# EAGLE board helmetpcb_bak (EAGLE 6.1)

Size 160 x 100 mm. Coordinates in mm from the lower left corner, seen from the top.
Outline: 0,0 160,0 160,100 0,100 0,0
Copper layers (1*16): Top 0.035mm / dielectric 1.5mm / Bottom 0.035mm
Design rules: minimum track width 10mil, minimum drill 24mil, track to track 8mil, track to pad 8mil, pad to pad 8mil, via to via 8mil, smd to smd 8mil, copper to edge 40mil, drill to drill 8mil, minimum pad ring 10mil, minimum via ring 8mil, stop-mask expansion 4mil, vias tented up to drill 0mil, thermal gap 10mil
Net classes: 1 vcc: width 0.254 mm
tKeepout: area 8.4,69 to 40.4,95

## Footprints (pad centres in the part's own frame; a part is rotated, then mirrored left to right if it is on the bottom)
C0402 = smd 0.7 x 0.9: 1 -0.65,0; 2 0.65,0
EIA3216 = smd 1.4 x 1.6: A 1.4,0; C -1.4,0
LED-0603 = smd 0.8 x 0.8: A 0,-0.75; C 0,0.75
1X02 = drill 1.016 long: 1 -1.27,0; 2 1.27,0
1X02' = drill 1.016: 1 0,0; 2 2.54,0
RESONATOR-SMD = smd 0.7 x 1.7: 1 -1.2,0; 2 0,0; 3 1.2,0
SOT23-BEC = smd 1 x 1.4: B -0.95,-1.1; C 0,1.1; E 0.95,-1.1
B3F-31XX = drill 1.016 octagon: 1 -2.261,-1.245; 2 2.261,-1.245 | drill 1.499 pad 2.159: 3 -3.505,1.245; 4 3.505,1.245
MA03-2 = drill 1.016: 1 -2.54,-1.27 | drill 1.016 octagon: 2 -2.54,1.27; 3 0,-1.27; 4 0,1.27; 5 2.54,-1.27; 6 2.54,1.27
SOT23-5 = smd 0.55 x 1.2: 1 -0.95,-1.3; 2 0,-1.3; 3 0.95,-1.3; 4 0.95,1.3; 5 -0.95,1.3
DSO-8-2 = smd 0.6 x 1.8: P$1 -1.905,-1.27; P$2 -0.635,-1.27; P$3 0.635,-1.27; P$4 1.905,-1.27; P$5 1.905,5.08; P$6 0.635,5.08; P$7 -0.635,5.08; P$8 -1.905,5.08
SO08 = smd 0.66 x 2.032: 1 -1.905,-3.073; 2 -0.635,-3.073; 3 0.635,-3.073; 4 1.905,-3.073; 5 1.905,3.073; 6 0.635,3.073; 7 -0.635,3.073; 8 -1.905,3.073
QFN20 = smd 1 x 1: 0 0,0 | smd 0.65 x 0.3: 1 -1.9,1; 2 -1.9,0.5; 3 -1.9,0; 4 -1.9,-0.5; 5 -1.9,-1; 11 1.9,-1; 12 1.9,-0.5; 13 1.9,0; 14 1.9,0.5; 15 1.9,1 | smd 0.3 x 0.65: 6 -1,-1.9; 7 -0.5,-1.9; 8 0,-1.9; 9 0.5,-1.9; 10 1,-1.9; 16 1,1.9; 17 0.5,1.9; 18 0,1.9; 19 -0.5,1.9; 20 -1,1.9
FIDUCIAL-1X2 = smd 1 x 1: 1 0,0
FE07 = drill 0.813 long: 1 -7.62,0; 3 -2.54,0; 4 0,0; 5 2.54,0; 6 5.08,0; 7 7.62,0
53261-02 = smd 0.8 x 2: 1 0.625,-2.5; 2 -0.625,-2.5 | smd 2.1 x 3: S1 3.125,0.625; S2 -3.125,0.625
53261-03 = smd 0.8 x 2: 1 1.25,-2.5; 2 0,-2.5; 3 -1.25,-2.5 | smd 2.1 x 3: S1 3.75,0.625; S2 -3.75,0.625

## Placement (x,y rotation side)
C1  1uF  [C0402]  115.57,58.42 0 top
C2  1uF  [C0402]  2.54,-20.32 0 top  (outside the outline)
C3  0.1uF  [C0402]  43.18,80.01 0 top
C4  0.1uF  [C0402]  8.89,29.21 0 top
C5  0.1uF  [C0402]  27.94,13.97 0 top
C6  0.1uF  [C0402]  115.57,50.8 0 top
C10  0.1uF  [C0402]  39.37,80.01 0 top
C13  10uF  [EIA3216]  62.23,78.74 0 top
C19  10uF  [EIA3216]  55.88,78.74 0 top
D3  Green  [LED-0603]  63.5,85.09 0 top
JP1  LUXEON LED  [1X02]  116.84,25.4 0 top
JP2  [1X02']  40.64,78.74 0 top
JP3  LUXDRIVE bucktoot  [1X02]  88.9,86.36 0 top
LED2  Red  [LED-0603]  16.51,8.89 0 top
Q1  #MHz  [RESONATOR-SMD]  71.12,80.01 0 top
Q2  MMBT3906LT1SMD  [SOT23-BEC]  116.84,71.12 0 top
Q3  BC850SMD  [SOT23-BEC]  36.83,57.15 0 top
R1  10K  [C0402]  12.7,19.05 0 top
R2  10K  [C0402]  74.93,85.09 0 top
R3  330  [C0402]  16.51,15.24 0 top
R4  5K  [C0402]  115.57,66.04 0 top
R5  5K  [C0402]  115.57,62.23 0 top
R6  330  [C0402]  71.12,85.09 0 top
R7  10K  [C0402]  115.57,54.61 0 top
R8  10K  [C0402]  113.03,48.26 0 top
R9  22K  [C0402]  115.57,35.56 0 top
R10  33k  [C0402]  115.57,31.75 0 top
R11  4.7k  [C0402]  2.54,-1.27 0 top
R12  4.7k  [C0402]  2.54,-5.08 0 top  (outside the outline)
R13  1K  [C0402]  2.54,-16.51 0 top  (outside the outline)
R14  5K  [C0402]  2.54,-24.13 0 top  (outside the outline)
S1  [B3F-31XX]  24.13,90.17 180 top
SV1  ICSP  [MA03-2]  43.18,13.97 0 top
U2  LP2992  [SOT23-5]  31.75,25.4 0 top
U3  BSP772T  [DSO-8-2]  30.48,83.82 180 top
U4  BSP772T  [SO08]  22.86,82.55 180 top
U$1  ATTINY84A-MU  [QFN20]  22.86,73.66 0 top
U$2  FIDUCIAL1X2  [FIDUCIAL-1X2]  57.15,83.82 0 top
U$4  FIDUCIAL1X2  [FIDUCIAL-1X2]  54.61,83.82 0 top
U$6  LUXDRIVE3021  [FE07]  86.36,24.13 0 bottom
X1  53261-02  [53261-02]  13.97,83.82 0 top
X2  53261-03  [53261-03]  13.97,74.93 0 top

## Library data of the parts
C1-C6 C10 C13 C19 D3 JP2 LED2 Q1 R1-R14 U2 U$2 U$4 = SparkFun
JP1 JP3 = pinhead
Q2 = transistor-pnp
Q3 = transistor-npn
S1 = switch-omron; MPN: B3F-3100; OC_FARNELL: 959704; OC_NEWARK: 36M3582
SV1 = con-lstb; OC_FARNELL: unknown; OC_NEWARK: unknown
U3 U4 U$6 = gumstix
U$1 = SparkFun-DigitalIC
X1 = con-molex; OC_FARNELL: 1125373; OC_NEWARK: unknown
X2 = con-molex; MF: MOLEX; MPN: 53261-0390; OC_FARNELL: 1125359; OC_NEWARK: 57H5006

## Nets
3.3V: C3.2 R7.2 SV1.2 U3.P$5 U3.P$6 U3.P$7 U3.P$8 U$1.9 X2.3
BAT: R9.1 R10.2 U$1.4
BUTTON: C6.1 JP2.1 R1.1 R7.1 S1.1 U$1.14
BUTTON2: Q1.3 R1.2 U$1.12
CTRL: Q2.C U$6.5
GND [vcc]: C1.1 C2.2 C3.1 C4.2 C5.2 C6.2 C10.2 C13.C C19.C D3.C JP2.2 JP3.2 LED2.C Q1.2 R8.1 R10.1 R11.1 R12.1 S1.2 SV1.6 U2.2 U3.P$1 U4.1 U$1.0 U$1.8 U$6.1 X1.2 X2.2
LASER: R11.2 U3.P$2 U$1.2
LED: Q1.1 R3.2 U$1.11
LIGHT2: R12.2 U4.2 U$1.3
LIGHTPWM: R4.1 R8.2 U$1.15
LUXDRIVE2: JP3.1 U4.3
LUXLED1+: JP1.1 U$6.7
LUXLED1-: JP1.2 U$6.6
MISO: SV1.1 U$1.20
MOSI: SV1.4 U$1.16
N$1: Q2.E R5.1
N$2: LED2.A R3.1
N$3: U3.P$3 X1.1
N$5: C2.1 Q3.B R13.1 R14.2
N$6: Q3.C R14.1
N$7: D3.A R6.2
N$8: C1.2 Q2.B R4.2 R5.2
N$9: C4.1 U2.4
N$10: Q3.E
RAW [vcc]: C19.A R9.2 U2.1 U2.3 U4.5 U4.6 U4.7 U4.8 U$6.3
REF: U$6.4
RESET: C5.1 R2.1 SV1.5 U$1.13
SCK: R6.1 SV1.3 U$1.1
TEMP: U$1.5 X2.1
VCC: C10.1 C13.A R2.2 U2.5

## Tracks (layer width: path | path; a pad name or v marks a point on that pad's centre or on a via)
3.3V  (8 unrouted)
BAT  (2 unrouted)
BUTTON  (5 unrouted)
BUTTON2  (2 unrouted)
CTRL  (1 unrouted)
GND  (27 unrouted)
LASER  (2 unrouted)
LED  (2 unrouted)
LIGHT2  (2 unrouted)
LIGHTPWM  (2 unrouted)
LUXDRIVE2  (1 unrouted)
LUXLED1+  (1 unrouted)
LUXLED1-  (1 unrouted)
MISO  (1 unrouted)
MOSI  (1 unrouted)
N$1  (1 unrouted)
N$2  (1 unrouted)
N$3  (1 unrouted)
N$5  (3 unrouted)
N$6  (1 unrouted)
N$7  (1 unrouted)
N$8  (3 unrouted)
N$9  (1 unrouted)
RAW  (8 unrouted)
RESET  (3 unrouted)
SCK  (2 unrouted)
TEMP  (1 unrouted)
VCC  (3 unrouted)